# Altium PCB usb_c.PcbDoc
Units mm, origin at the board's own origin, x right, y up, seen from the top; angles counter-clockwise.
Board outline 20.45 x 16 mm, 2 copper layers (Top Layer, Bottom Layer); 20 components, 17 nets, 66 pads, 22 vias.
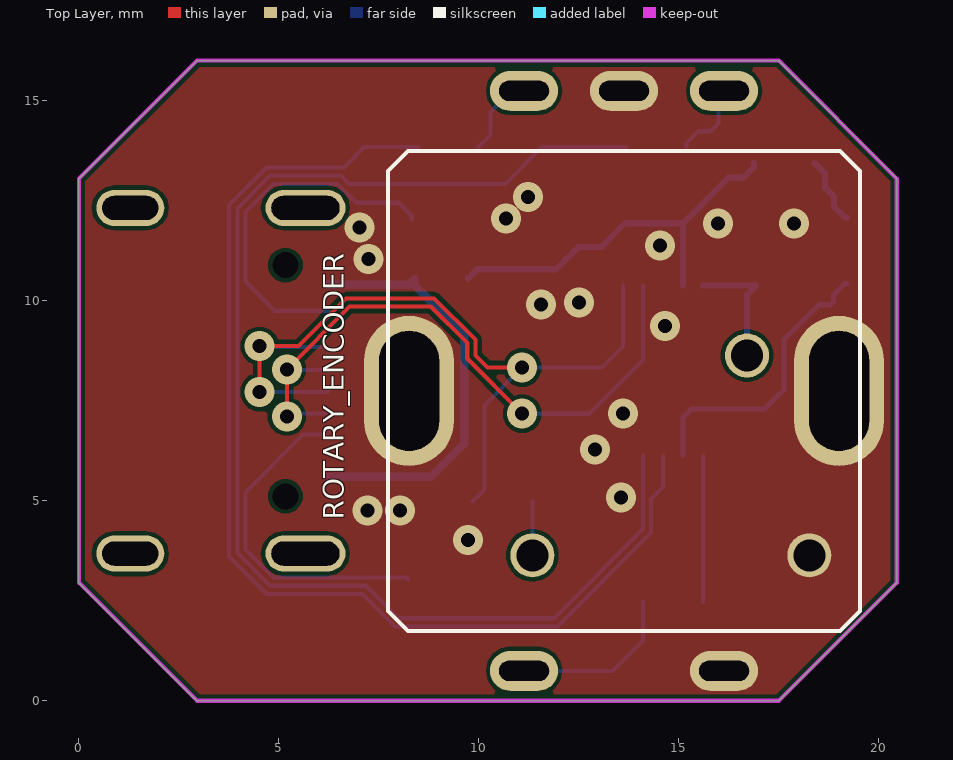
[diagram p0: Top Layer view]
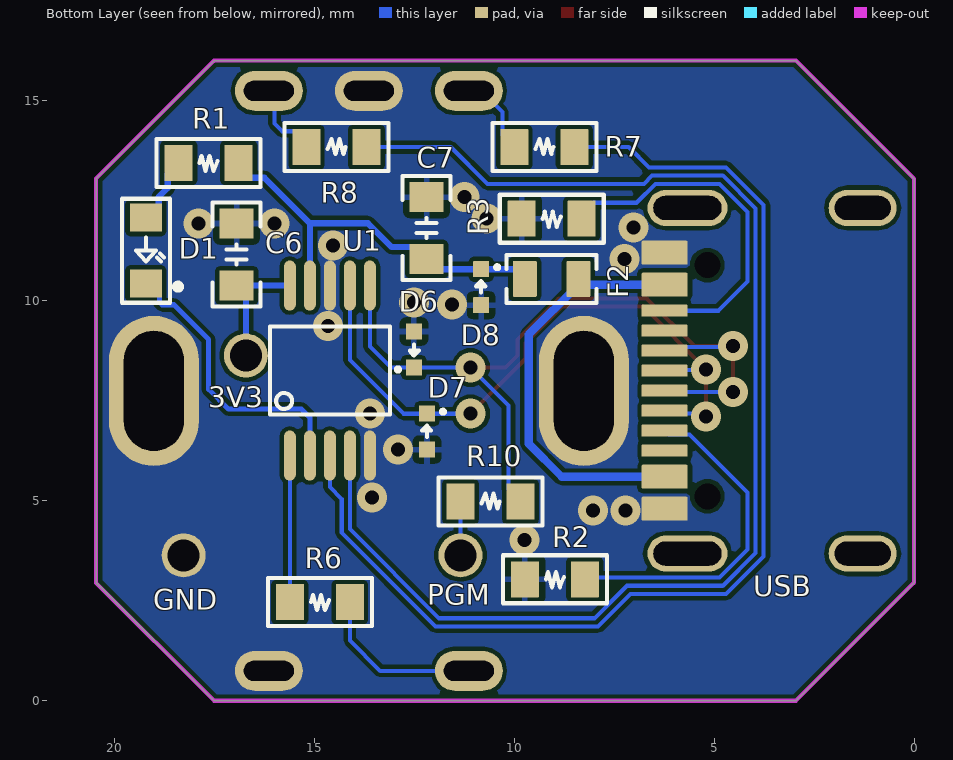
[diagram p1: Bottom Layer view, seen from below]
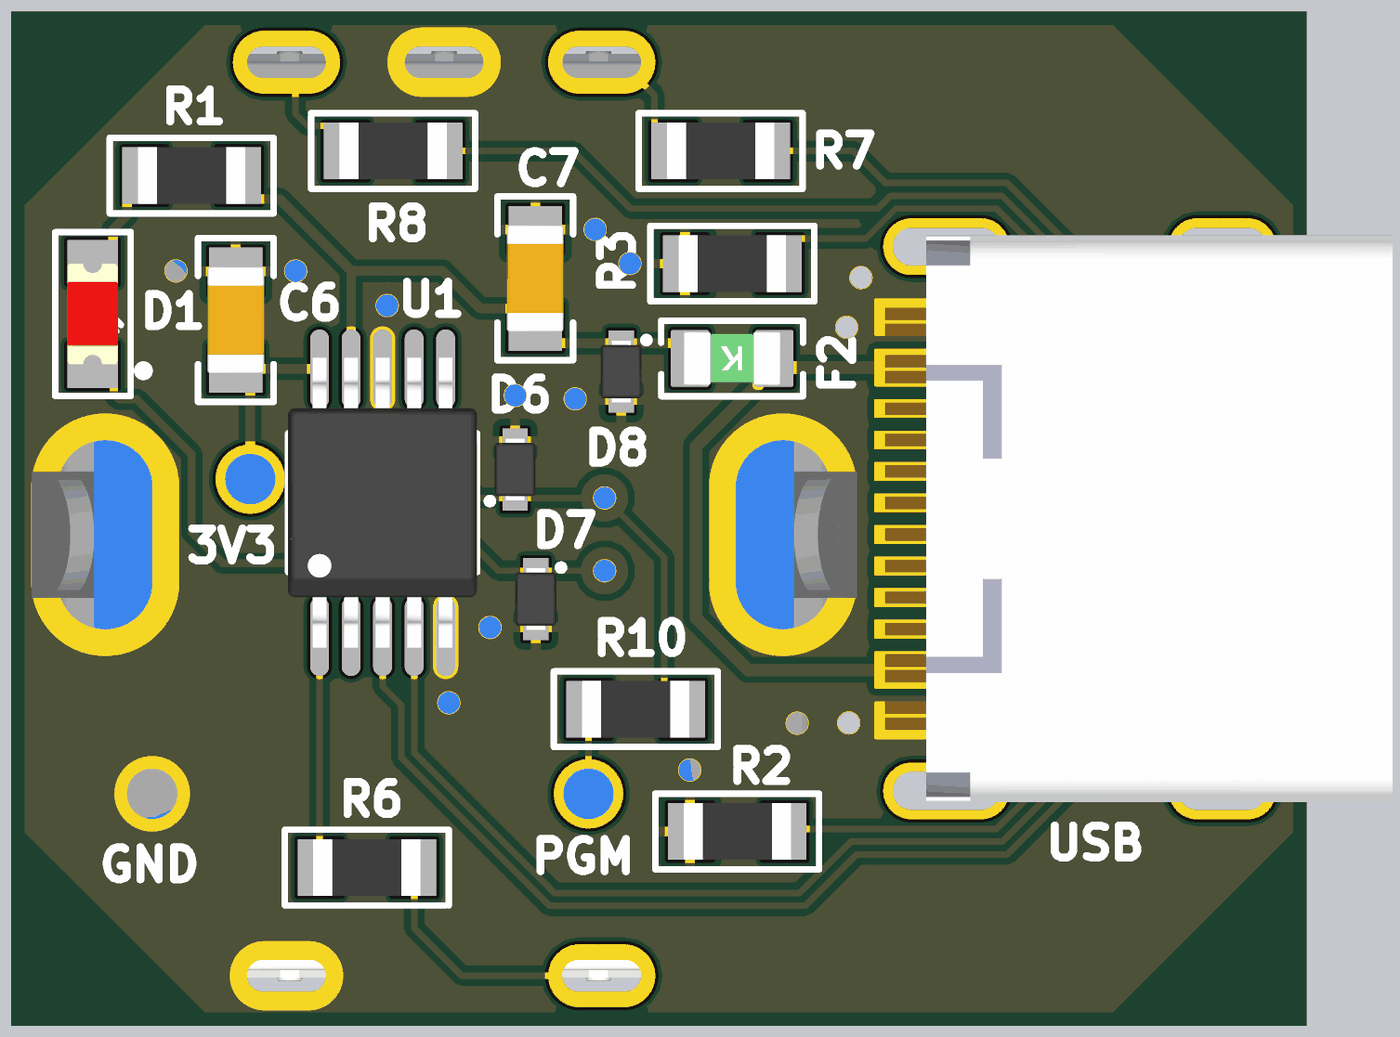
[diagram p2: 3D render of the assembled board from below, using the file's embedded part models]

## Layer stack, top to bottom
Top Solder: solder mask 0.0102, Solder Resist, Dk 3.5
Top Layer: signal copper 0.0356
Dielectric 1: dielectric 0.32, FR-4, Dk 4.8
Bottom Layer: signal copper 0.0356
Bottom Solder: solder mask 0.0102, Solder Resist, Dk 3.5

## Board outline
2.95,0 0,2.95 0,13.05 2.952,16.002 17.5,16.002 17.5,16 20.447,13.053 20.447,2.947 17.5,0

## Design rules (kind name [scope] priority, off if disabled: settings)
BoardOutlineClearance [(OnLayer('Top Layer') AND OnLayer('Bottom Layer'))] p1: gap=0.005 ignorepadtopadclearanceinfootprint=FALSE
Clearance [All] p1: gap=0.102 ignorepadtopadclearanceinfootprint=FALSE
ComponentClearance [All] p1: gap=0 collisioncheckmode=3 verticalgap=0.254 showdistances=FALSE
DiffPairsRouting [All] p1: maxlimit=0.254 minlimit=0.102 mostfreqgap=0.254 toplayer_minwidth=0.102 toplayer_maxwidth=0.762 toplayer_prefwidth=0.102 bottomlayer_minwidth=0.102 bottomlayer_maxwidth=0.762 bottomlayer_prefwidth=0.102 maxuncoupledlength=25.4
Height [All] p1: minheight=0 maxheight=100 prefheight=12.7
HoleSize [All] p1: absolutevalues=TRUE maxlimit=10 minlimit=0.349 maxpercent=80.000 minpercent=20.000
MinimumSolderMaskSliver [All] p1: minsoldermaskwidth=0.099
PolygonConnect PolygonConnect_GND [(InNet('GND')) AND (IsVia OR (AsMM(PadXSize_AllLayers) >= 1) OR (AsMM(PadYSize_AllLayers) >= 1))] p1: connectstyle=Direct reliefconductorwidth=0.254 reliefentries=4 polygonreliefangle="90 Angle" airgapwidth=0.254
PolygonConnect [All] p2: connectstyle=Relief reliefconductorwidth=0.152 reliefentries=4 polygonreliefangle="90 Angle" airgapwidth=0.152
RoutingVias [All] p1: holewidth=0.711 width=1.27 viastyle="Through Hole" minholewidth=0.711 minwidth=1.27 maxholewidth=0.711 maxwidth=1.27 useviatemplates=TRUE viatemplateguid#1={37BE50EF-ECFB-439D-A1F6-95DF1589E5C6} viatemplateguid#2={D44B89CC-E193-4854-BE8E-438F9D94CD6F} viatemplatename#1=GND viatemplatename#2=ROUTING
SilkToSilkClearance [All] p1: silktosilkclearance=0
SilkToSolderMaskClearance [False vs False] p1: minsilkscreentomaskgap=0.254 clearancetoexposedcopper=TRUE
SolderMaskExpansion [All] p1: expansion=0.05 istentingtop=FALSE
SupplyNets "Schematic Supply Nets_2" [InNet('3v3')] p1: voltage=0.000
SupplyNets "Schematic Supply Nets_1" [InNet('VUSB')] p2: voltage=0.000
SupplyNets "Schematic Supply Nets" [InNet('GND')] p3: voltage=0.000
Width [All] p1: maxlimit=0.762 minlimit=0.102 preferedwidth=0.127 minimp=50.000000 maximp=50.000000 favimp=50.000000
23 further rules are at their usual default settings.

## Components (designator, comment, footprint, x,y, rotation, side; value= is the part's Value field where it differs from the comment)
3V3 "CON2" CON2 16.705,8.63 r90 bottom
C6 "1uF" MLCC_0603 16.934,11.155 r270 bottom
C7 "1uF" MLCC_0603 12.184,11.816 r270 bottom
D1 "20mA" SMT_LED_0603 19.2,11.25 r90 bottom
D6 "TVS_DIODE" TVS_DIODE 12.504,8.781 r90 bottom
D7 "TVS_DIODE" TVS_DIODE 12.175,6.725 r270 bottom
D8 "TVS_DIODE" TVS_DIODE 10.821,10.337 r270 bottom
F2 "1A" "FUSE 0603_1608 0.5MM" 9.062,10.545 r0 bottom
GND "CON2" CON2 18.26,3.635 r90 bottom
PGM "CON2" CON2 11.34,3.635 r90 bottom
R1 "680r" SMT_RES_0603 17.634,13.448 r0 bottom
R2 "5.1k" SMT_RES_0603 8.98,3.037 r0 bottom
R3 "5.1k" SMT_RES_0603 9.058,12.05 r0 bottom
R6 "220r" SMT_RES_0603 14.855,2.464 r0 bottom
R7 "220r" SMT_RES_0603 9.244,13.838 r180 bottom
R8 "220r" SMT_RES_0603 14.44,13.838 r180 bottom
R10 "10k" SMT_RES_0603 10.59,4.978 r180 bottom
ROTARY_ENCODER "ROTARY_ENCODER" ENCODER 13.63,7.747 r180 top
U1 "CH554E" MSOP10 14.605,8.255 r180 bottom
USB "USB_C_16_PIN" USB_C_16PIN 1.485,8 r90 bottom

## Footprints (in the part's own frame and the unit in brackets; to place one, negate y for a bottom-side part, rotate by r counter-clockwise, add the part's x,y. Pads: shape width x height; smd on the part's side, far side on the other; paste and mask are expansions set on the pad)
CON2 [mm] "Debug header"
  rrect100% 1.1x1.1 hole 0.8: 1(0,0)
ENCODER [mm] "Rotary encoder"
  oval 1.7x1 hole 0.5 slot 1.25 at 0 deg: 1(-2.5,-7.5) 2(0,-7.5) 3(2.5,-7.5) 4(-2.5,7) 5(2.5,7)
  rrect100% 2.25x3.75 hole 1.5 slot 3 at 90 deg: 2(-5.375,0)
  oval 2.25x3.75 hole 1.5 slot 3 at 90 deg: 2(5.375,0)
  silkscreen extent -5.9,-6 5.9,6, body extent -6.55,-7.68 6.55,7.08, height 21.18
"FUSE 0603_1608 0.5MM" [mm] "Chip Fuse 1.5A AC 5V DC, 2-Leads, Body 1.54x0.85mm"
  rrect10% 0.6x0.9 smd: 1(-0.67,0) 2(0.67,0)
  silkscreen extent -1.12,-0.6 1.12,0.6, body extent -0.77,-0.42 0.77,0.43, height 0.58
MLCC_0603 [mm] "MLCC 0603"
  rrect1% 0.75x0.85 smd: 1(-0.775,0) 2(0.775,0)
  silkscreen extent -1.3,-0.6 1.3,0.6, body extent -0.85,-0.45 0.85,0.45, height 0.7
MSOP10 [mm] "MSOP10 3x3 x 0.5"
  oval 0.3x1.25 smd: 1(-1,-2.125) 2(-0.5,-2.125) 3(0,-2.125) 4(0.5,-2.125) 5(1,-2.125) 6(1,2.125) 7(0.5,2.125) 8(0,2.125) 9(-0.5,2.125) 10(-1,2.125)
  silkscreen extent -1.5,-1.1 1.5,1.1, body extent -1.5,-2.3 1.5,2.3, height 1
SMT_LED_0603 [mm] "SMT LED 0603"
  rrect1% 0.7x0.8 smd: 1(-0.823,0.005) 2(0.827,0.005)
  silkscreen extent -1.3,-0.85 1.3,0.6, body extent -0.8,-0.39 0.8,0.41, height 0.8
SMT_RES_0603 [mm] "0603 SMT Resistor"
  rrect1% 0.7x0.9 smd: 1(-0.75,0) 2(0.75,0)
  silkscreen extent -1.3,-0.6 1.3,0.6, body extent -0.85,-0.45 0.85,0.45, height 0.5
TVS_DIODE [mm] "SODFL 98x40 2 pin"
  rrect1% 0.4x0.4 smd: 1(-0.45,0) 2(0.45,0)
  silkscreen extent -0.55,-0.13 0.13,0.45, body extent -0.49,-0.33 0.49,0.33, height 0.4
USB_C_16PIN [mm]
  rrect10% 0.6x1.15 smd paste-2539.97 mask+0: 1(-3.2,4.75) 2(-2.4,4.75) 11(2.4,4.75) 12(3.2,4.75)
  rrect10% 0.3x1.15 smd paste-2539.97 mask+0: 3(-1.75,4.75) 4(-1.25,4.75) 5(-0.75,4.75) 6(-0.25,4.75) 7(0.25,4.75) 8(0.75,4.75) 9(1.25,4.75) 10(1.75,4.75)
  oval 0.9x1.7 hole 0.6 slot 1.4 at 90 deg: S(-4.32,-0.2) S(4.32,-0.2)
  oval 0.9x2 hole 0.6 slot 1.7 at 90 deg: S(-4.32,4.18) S(4.32,4.18)
  round 0 hole 0.65 unplated paste-2539.97 mask+0: SHELL1(-2.89,3.68) SHELL1(2.89,3.68)
  body extent -4.5,-2.9 4.5,5.15, height 3.2

## Part data
C6 C7: library part CAP_CERAMIC, "MLCC", JLCPCB Part #=C29936
D1: library part LED, "LED", JLCPCB Part #=C205445
D6 D7 D8: "TVS Diode", JLCPCB Part #=C151980
F2: library part FUSE, "Resettable fuse", JLCPCB Part #=C210357
R1: library part RESISTOR, "Resistor", JLCPCB Part #=C23228
R2 R3 R10: library part RESISTOR, "Resistor", JLCPCB Part #=C25804
R6 R7 R8: library part RESISTOR, "Resistor", JLCPCB Part #=C27592
ROTARY_ENCODER: "Rotary Encoder"
U1: JLCPCB Part #=C111293
USB: "USB Receptacle TYPE-C 16PIN 2MD", JLCPCB Part #=C2765186

## Via types
v1: diameter 0.75, hole 0.35, Top Layer to Bottom Layer, tented both sides, 22 vias

## Nets (pads, with @x,y where several pads share a name; then routed paths per layer and width w, separated by ;. In a path a pad name is that pad's centre, name@x,y a point inside that pad or via, vN(x,y) a via of type N, cw(c..) or ccw(c..) an arc to the next point about the centre after c; other vN are vias at no path point)
3v3: 3V3.1 C6.2 U1.10 | length 3.2
  Bottom Layer w0.152: U1.10 C6.2 16.705,10.151 3V3.1
BUTTON: R6.2 U1.1 | length 3.7
  Bottom Layer w0.102: R6.2 U1.1
CC1: R2.1 USB.4 | length 8.5
  Bottom Layer w0.102: USB.4 6.136,6.651 5.609,6.651 4.166,5.208 4.166,3.778 4.866,3.078 8.189,3.078 R2.1
CC2: R3.1 USB.10 | length 9
  Bottom Layer w0.102: USB.10 4.893,9.75 4.166,10.477 4.166,12.222 4.866,12.922 6.465,12.922 6.938,12.449 8.009,12.449 8.322,12.136 R3.1@8.322,12.036
CHA: R8.2 U1.4 | length 32.7
  Bottom Layer w0.102: R8.2 11.582,13.838 10.667,12.922 6.752,12.922 6.549,13.126 4.782,13.126 3.962,12.306 3.962,3.694 4.782,2.874 7.176,2.874 7.989,2.061 11.877,2.061 14.105,4.289 U1.4
CHB: R7.2 U1.3 | length 28.4
  Bottom Layer w0.102: R7.2 7.133,13.838 6.623,13.329 4.698,13.329 3.759,12.39 3.759,3.61 4.698,2.671 7.091,2.671 7.904,1.858 11.961,1.858 14.308,4.205 14.308,5.042 14.605,5.339 U1.3
GND: C6.1 C7.1 D6.2 D7.2 D8.2 GND.1 R2.2 R3.2 ROTARY_ENCODER.2 ROTARY_ENCODER.4 U1.5 U1.8 USB.1 USB.12
  other v1: 9.733,4.013 7.212,4.76 8.029,4.755 13.555,5.079 12.902,6.275 13.6,7.181 14.654,9.367 11.55,9.903 12.501,9.957 7.244,11.039 14.532,11.385 7.018,11.828 15.984,11.932 17.884,11.934 10.683,12.053 11.234,12.593
LED_A: D1.2 R1.2 | length 1.7
  Bottom Layer w0.152: R1.2 18.657,13.174 18.657,12.821 18.881,12.597 18.881,12.351 19.155,12.077 D1.2
LED_C: D1.1 U1.2 | length 7.3
  Bottom Layer w0.127: U1.2 15.105,7.08 15.319,7.294 17.144,7.294 17.634,7.784 17.634,9.03 18.503,9.899 18.794,9.899 18.869,9.973 18.869,10.14 19.155,10.427 D1.1
PGM: PGM.1 R10.1 | length 1.3
  Bottom Layer w0.102: PGM.1 R10.1
RTA: R8.1 ROTARY_ENCODER.1 | length 2
  Bottom Layer w0.102: R8.1 15.19,13.938 15.489,14.237 15.798,14.237 15.99,14.429 15.99,15.107 ROTARY_ENCODER.1
RTB: R7.1 ROTARY_ENCODER.3 | length 2.1
  Bottom Layer w0.102: R7.1 10.293,14.137 10.293,14.72 10.649,15.075 10.958,15.075 ROTARY_ENCODER.3
SWB: R6.1 ROTARY_ENCODER.5 | length 4.2
  Bottom Layer w0.102: ROTARY_ENCODER.5 13.345,0.747 14.105,1.507 R6.1
USB_D_N: D7.1 U1.7 USB.5 USB.7 | length 16.6
  Top Layer w0.102: v1(5.199,7.108) v1(5.199,8.286) 6.767,9.854 8.798,9.854 9.71,8.942 9.71,8.549 v1(11.085,7.175)
  Bottom Layer w0.102: v1(5.199,7.108) 5.27,7.179 6.164,7.179 USB.5 ; v1(5.199,8.286) 5.217,8.268 6.217,8.268 USB.7 ; v1(11.085,7.175) D7.1 12.764,7.175 14.105,8.516 U1.7
USB_D_P: D6.1 R10.2 U1.6 USB.6 USB.8 | length 20.8
  Top Layer w0.102: v1(4.521,7.716) v1(4.521,8.865) 5.49,8.865 6.683,10.058 8.882,10.058 9.914,9.026 9.914,8.634 10.216,8.331 v1(11.085,8.331)
  Bottom Layer w0.102: v1(4.521,7.716) 6.202,7.716 USB.6 ; v1(4.521,8.865) 4.548,8.838 6.147,8.838 USB.8 ; R10.2 10.139,5.277 10.139,7.385 v1(11.085,8.331) D6.1 13.081,8.331 13.605,8.855 U1.6
VIN: F2.1 USB.2 USB.11 | length 10.6
  Bottom Layer w0.203: USB.2 8.808,5.6 9.634,6.426 9.634,9.153 8.392,10.395 F2.1 8.247,10.4 USB.11
VUSB: C7.2 D8.1 F2.2 R1.1 U1.9 | length 10
  Bottom Layer w0.152: F2.2 9.732,10.563 9.956,10.787 D8.1 11.93,10.787 C7.2 12.483,11.34 13.057,11.34 13.654,11.937 15.105,11.937 ; U1.9 15.105,11.937 ; R1.1 16.884,13.348 16.61,13.074 16.241,13.074 15.105,11.937
pads on no net: USB.3 USB.9 USB.S USB.SHELL1

## Polygon pours and split planes (outlines as drawn)
GND on Bottom Layer "GND_L02_P000" (solid, remove dead copper, pour order 0): 0,16.002 20.447,16.002 20.447,0 0,0
GND on Top Layer "GND_L01_P002" (solid, remove dead copper, pour order 2): 0,16.002 20.447,16.002 20.447,0 0,0

## Keep-outs
Keep-Out Layer:
  lines w0.102: 17.5,16 20.447,13.053 20.447,2.947 17.5,0 2.95,0 0,2.95 0,13.05 2.952,16.002 17.5,16.002

## Silkscreen, mask and mechanical layers (free items; w line width, h text height)
Board Shape:
  lines w0.102: 0,2.95 2.95,0 17.5,0 20.45,2.95 20.45,13.05 17.5,16 2.95,16 0,13.05 0,2.95